# Altium PCB pcb.PcbDoc
Units mm, origin at the board's own origin, x right, y up, seen from the top; angles counter-clockwise.
Board outline 71.12 x 60.71 mm, 2 copper layers (Top Layer, Bottom Layer); 43 components, 35 nets, 151 pads, 18 vias.
Unrouted connection lines stored in the file: 6.
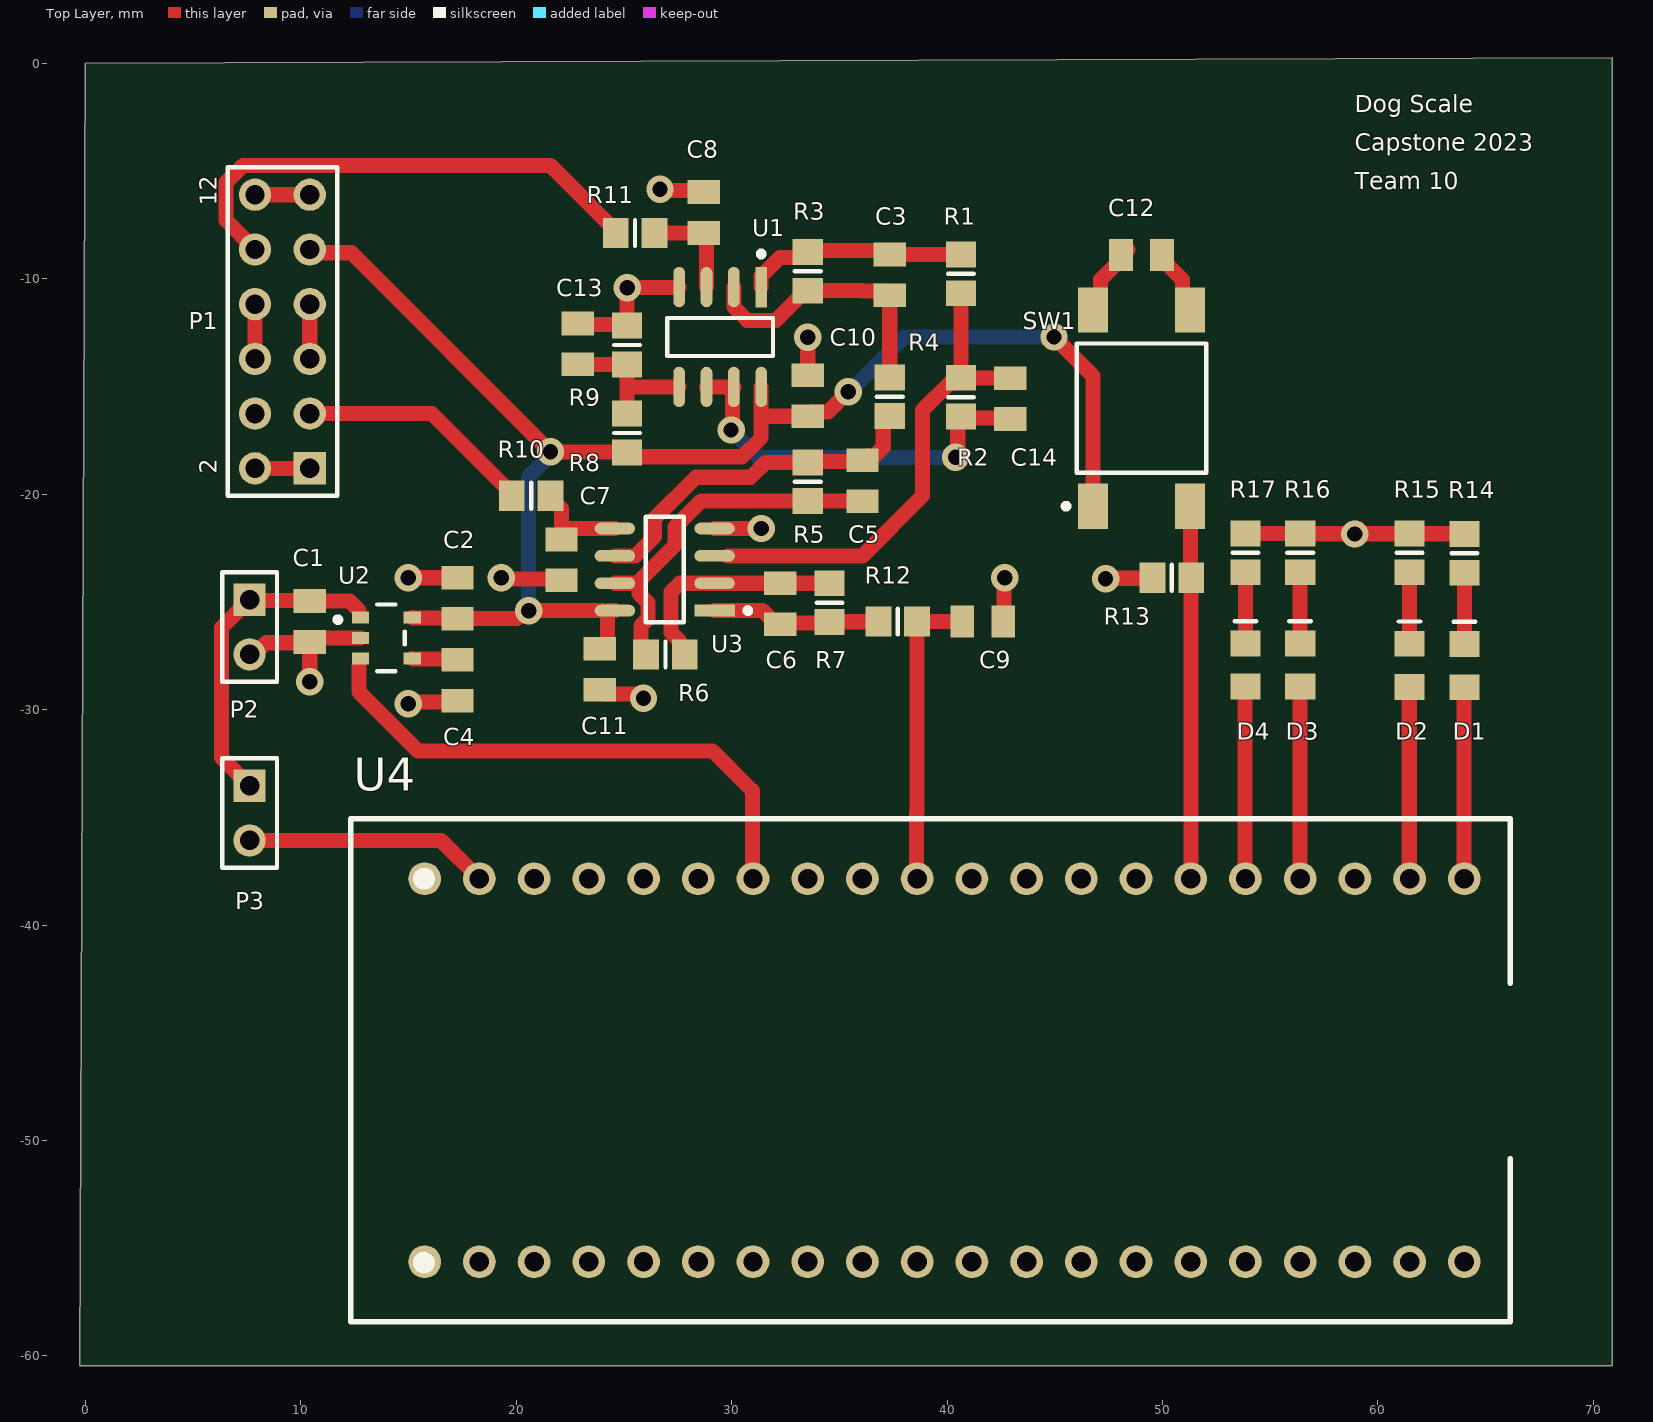
[diagram p0: Top Layer view]
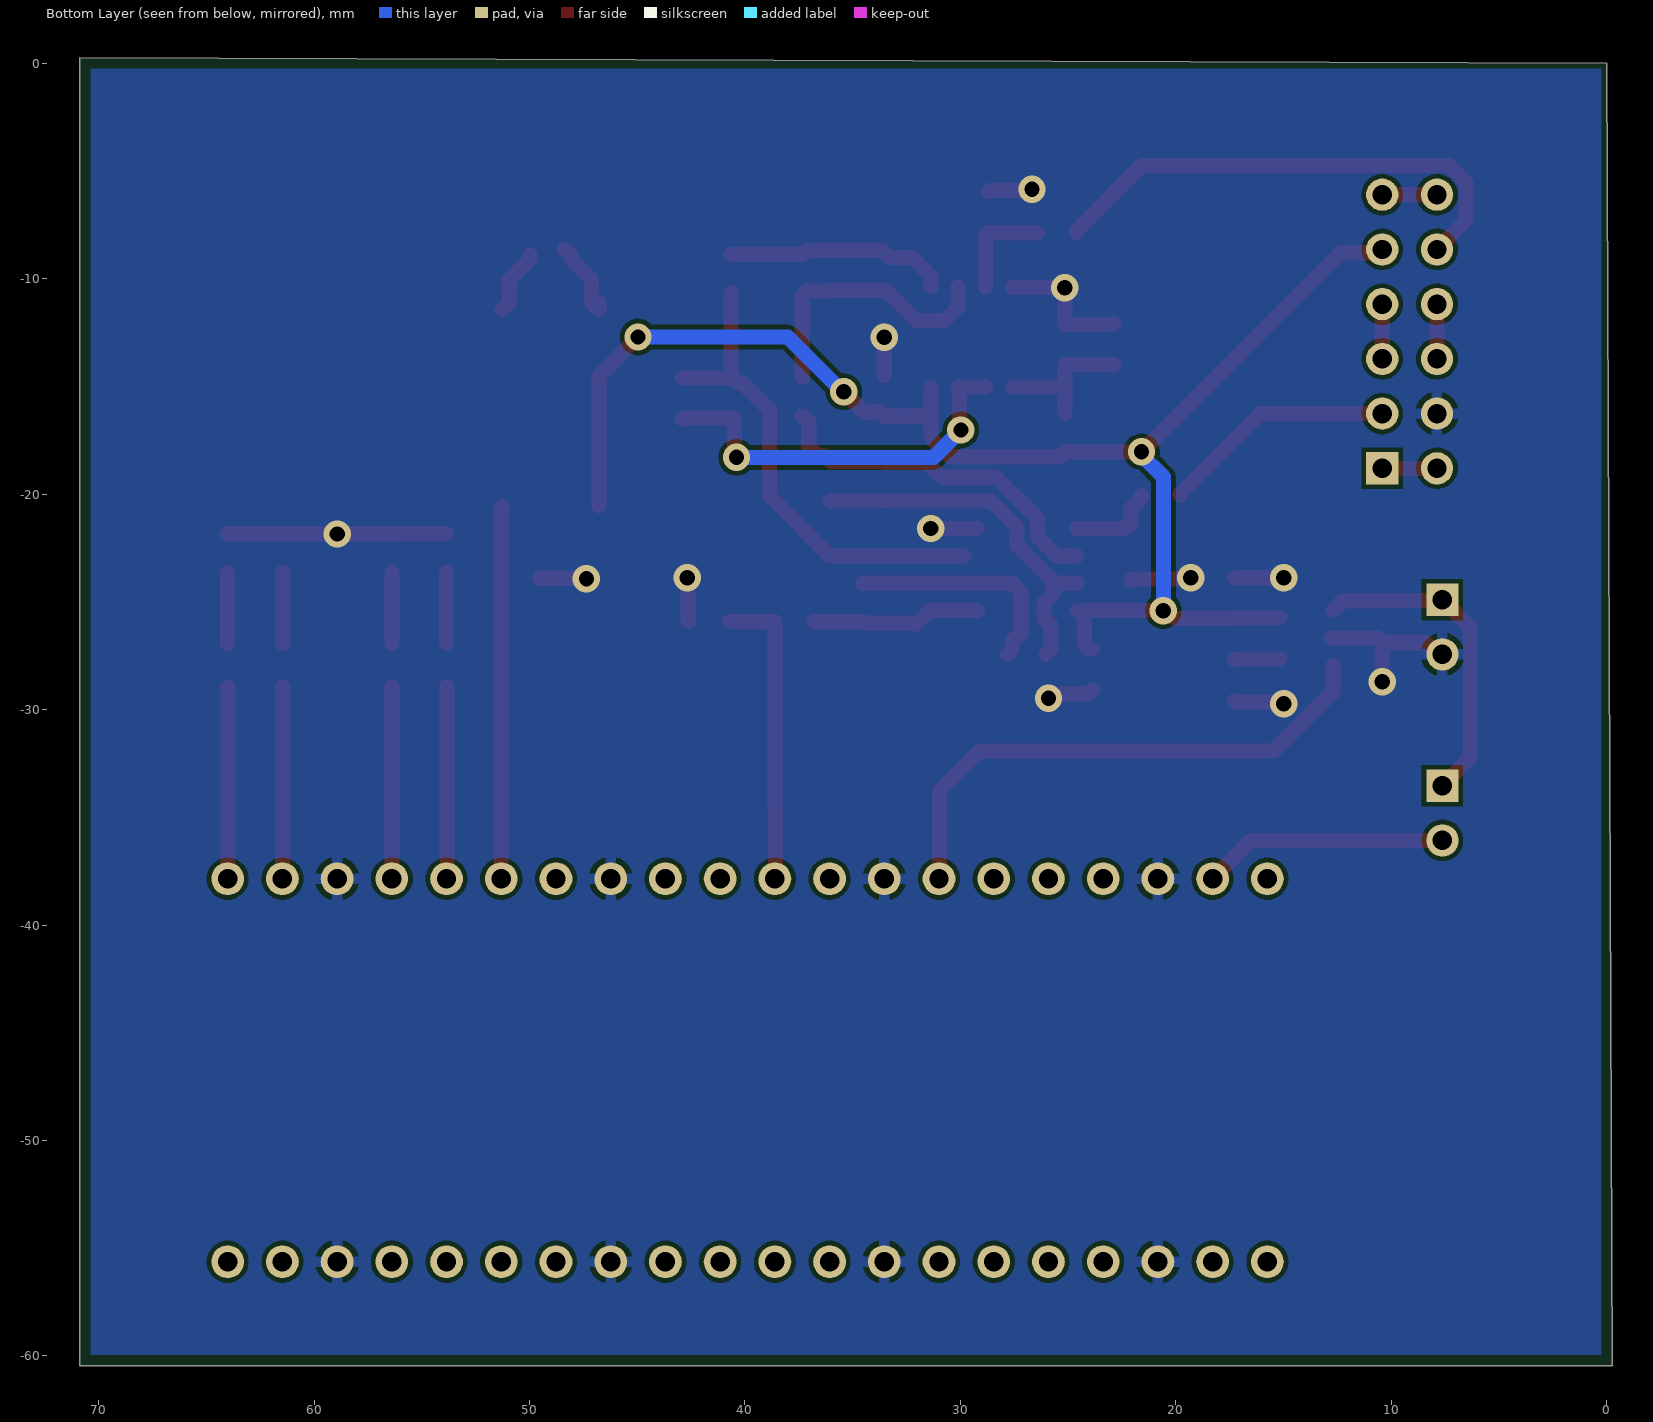
[diagram p1: Bottom Layer view, seen from below]

## Layer stack, top to bottom
Top Solder: solder mask 0.0102, Solder Resist, Dk 3.5
Top Layer: signal copper 0.0356
Dielectric 1: dielectric 0.32, FR-4, Dk 4.8
Bottom Layer: signal copper 0.0356
Bottom Solder: solder mask 0.0102, Solder Resist, Dk 3.5

## Board outline
-0.254,-60.452 70.866,-60.452 70.866,0.254 0,0

## Design rules (kind name [scope] priority, off if disabled: settings)
BoardOutlineClearance [All] p1: gap=0.2 ignorepadtopadclearanceinfootprint=FALSE except(0.4: Arc-SplitBarrior Arc-SplitContinuation Track-SplitBarrior Track-SplitContinuation SMDPad-SplitBarrior SMDPad-SplitContinuation THPad-SplitBarrior THPad-SplitContinuation Via-SplitBarrior Via-SplitContinuation Fill-SplitBarrior Fill-SplitContinuation Poly-SplitBarrior Poly-SplitContinuation Region-SplitBarrior Region-SplitContinuation Text-SplitBarrior Text-SplitContinuation)
Clearance "Clearance Bottom Layer" [OnLayer('Bottom Layer')] p1: gap=0.203 ignorepadtopadclearanceinfootprint=TRUE except(0.254: Arc-Text Track-Text SMDPad-Text THPad-Text Via-Text Fill-Text Poly-Text Region-Text Text-Text)
Clearance "Clearance Top Layer" [OnLayer('Top Layer')] p2: gap=0.203 ignorepadtopadclearanceinfootprint=TRUE except(0.254: Arc-Text Track-Text SMDPad-Text THPad-Text Via-Text Fill-Text Poly-Text Region-Text Text-Text)
Clearance [All] p3: gap=0.2 ignorepadtopadclearanceinfootprint=FALSE except(0.089: Arc-Arc Arc-Track Arc-SMDPad Track-Track Track-SMDPad SMDPad-SMDPad; 0.127: Arc-Via Track-Via SMDPad-Via THPad-Via Via-Via; 0.254: Arc-Text Track-Text SMDPad-Text THPad-Text Via-Text Fill-Text Poly-Text Region-Text Text-Text)
HoleSize [All] p1: absolutevalues=TRUE maxlimit=6.3 minlimit=0.2 maxpercent=80.000 minpercent=20.000
MinimumAnnularRing [All] p1: minimumring=0.076
MinimumSolderMaskSliver [All] p1: minsoldermaskwidth=0.1
PolygonConnect PolygonConnect_1 [All] p1: thpad.connectstyle=Relief thpad.reliefconductorwidth=0.508 thpad.reliefentries=4 thpad.polygonreliefangle="90 Angle" thpad.airgapwidth=0.254 smdpad.connectstyle=Relief smdpad.reliefconductorwidth=0.508 smdpad.reliefentries=4 smdpad.polygonreliefangle="90 Angle" smdpad.airgapwidth=0.254 via.connectstyle=Direct via.reliefconductorwidth=0.508 via.reliefentries=4 via.polygonreliefangle="90 Angle" via.airgapwidth=0.254
RoutingCorners [All] p1: cornerstyle=Round minsetback=2.54 maxsetback=2.54
RoutingVias [All] p1: holewidth=0.5 width=1 viastyle="Through Hole" minholewidth=0.2 minwidth=0.45 maxholewidth=1 maxwidth=2
SilkToSilkClearance [All] p1: silktosilkclearance=0.1
SilkToSolderMaskClearance [IsPad] p1: minsilkscreentomaskgap=0.1 clearancetoexposedcopper=TRUE
SolderMaskExpansion [All] p1: expansion=0.102 istentingtop=FALSE
Width [All] p1: maxlimit=0.7 minlimit=0.7 preferedwidth=0.7 minimp=50.000000 maximp=50.000000 favimp=50.000000
25 further rules are at their usual default settings.

## Components (designator, comment, footprint, x,y, rotation, side; value= is the part's Value field where it differs from the comment)
C1 "1u" C0805 10.414,-25.908 r90 top
C2 "2.2u" C0805 17.272,-24.826 r270 top
C3 "1n" C0805 37.338,-9.818 r90 top
C4 "100p" C0805 17.272,-28.636 r90 top
C5 "1n" C0805 36.068,-19.37 r90 top
C6 "15n" C0805 32.258,-25.08 r90 top
C7 "470n" C0805 22.098,-23.048 r90 top
C8 "470n" C0805 28.702,-6.924 r270 top
C9 "470n" C0805 41.656,-25.908 r180 top
C10 "100n" C0805 33.528,-15.428 r270 top
C11 "100n" C0805 23.876,-28.128 r90 top
C12 "470n" C0805 49.022,-8.89 r180 top
C13 "100n" C0805 22.86,-13.02 r270 top
C14 "15n" C0805 42.926,-15.56 r90 top
D1 "LED" LED0805 64.008,-27.956 r90 top
D2 "LED" LED0805 61.468,-27.94 r90 top
D3 "LED" LED0805 56.388,-27.924 r90 top
D4 "LED" LED0805 53.848,-27.924 r90 top
P1 "Header 6X2" HDR2X6 10.414,-18.796 r90 top
P2 "Header 2" HDR1X2 7.62,-24.892 r270 top
P3 "Header 2" HDR1X2 7.62,-33.528 r270 top
R1 "10k" R0805 40.64,-9.768 r90 top
R2 "33k" R0805 40.64,-15.494 r90 top
R3 "270k" R0805 33.528,-9.652 r90 top
R4 "1.2k" R0805 37.338,-15.472 r90 top
R5 "270k" R0805 33.528,-19.42 r90 top
R6 "10k" R0805 26.924,-27.432 r180 top
R7 "33k" R0805 34.544,-25.03 r90 top
R8 "15k" R0805 25.146,-17.156 r270 top
R9 "18k" R0805 25.146,-13.07 r270 top
R10 "1k" R0805 20.69,-20.066 r180 top
R11 "1k" R0805 25.516,-7.874 r180 top
R12 "1k" R0805 37.708,-25.908 r180 top
R13 "220" R0805 50.43,-23.876 r0 top
R14 "220" R0805 64.008,-22.744 r270 top
R15 "220" R0805 61.468,-22.722 r270 top
R16 "220" R0805 56.388,-22.722 r270 top
R17 "220" R0805 53.848,-22.722 r270 top
SW1 "FSM6JSMA" TECO-FSM6JSMA_V 49.022,-16.002 r180 top
U1 "LM358DR2G" FP-751-07-IPC_C 29.464,-12.7 r270 top
U2 "AP2202K-3.3TRG1" FP-SOT25-MFG 13.97,-26.67 r0 top
U3 "LM358DR2G" FP-751-07-IPC_C 26.894,-23.495 r180 top
U4 "RPI" RPI-PICO-MOD 40.259,-46.736 r90 top

## Footprints (in the part's own frame and the unit in brackets; to place one, negate y for a bottom-side part, rotate by r counter-clockwise, add the part's x,y. Pads: shape width x height; smd on the part's side, far side on the other; paste and mask are expansions set on the pad)
C0805 [mm]
  rect 1.1x1.5 smd: 1(-0.95,0) 2(0.95,0)
  body extent -1.1,-0.72 1.1,0.72, height 1.1
FP-751-07-IPC_C [mm]
  rect 1.874x0.543 smd paste+0 mask+0: 1(-2.316,1.905)
  rrect100% 1.874x0.543 smd paste+0 mask+0: 2(-2.316,0.635) 3(-2.316,-0.635) 4(-2.316,-1.905) 5(2.316,-1.905) 6(2.316,-0.635) 7(2.316,0.635) 8(2.316,1.905)
  silkscreen extent -3.98,-2.45 0.88,2.45, body extent -3.35,-2.55 3.35,2.55, height 0.25
FP-SOT25-MFG [mm]
  rect 0.8x0.55 smd paste+0 mask+0: 1(-1.2,0.95) 2(-1.2,0) 3(-1.2,-0.95) 4(1.2,-0.95) 5(1.2,0.95)
  silkscreen extent -2.37,-1.55 0.85,1.55, body extent -1.7,-1.65 1.7,1.65, height 0.25
HDR1X2 [mm] "Connector; Header; 2 Position"
  rect 1.5x1.5 hole 0.9: 1(0,0)
  round 1.5 hole 0.9: 2(2.54,0)
  silkscreen extent -1.27,-1.27 3.81,1.27
HDR2X6 [mm] "Connector; Header; 6x2 Position"
  rect 1.5x1.5 hole 0.9: 1(0,0)
  round 1.5 hole 0.9: 2(0,2.54) 3(2.54,0) 4(2.54,2.54) 5(5.08,0) 6(5.08,2.54) 7(7.62,0) 8(7.62,2.54) 9(10.16,0) 10(10.16,2.54) 11(12.7,0) 12(12.7,2.54)
  silkscreen extent -1.27,-1.27 13.97,3.81
LED0805 [mm]
  rect 1.2x1.4 smd: 1(-1,0) 2(1,0)
  silkscreen extent 2.03,-0.5 2.03,0.5, body extent -1.07,-0.7 1.07,0.7, height 0.65
R0805 [mm]
  rect 1.2x1.4 smd: 1(-0.9,0) 2(0.9,0)
  silkscreen extent 0,-0.6 0,0.6, body extent -1.07,-0.7 1.07,0.7, height 0.65
RPI-PICO-MOD [mil] "RASPBERRY PI PICO RP2040 BOARD"
  round 60 hole 35.43: 0.9mm(350,65) 1(-350,965) 2(-350,865) 3(-350,765) 4(-350,665) 5(-350,565) 6(-350,465) 7(-350,365) 8(-350,265) 9(-350,165) 10(-350,65) 11(-350,-35) 12(-350,-135) 13(-350,-235) 14(-350,-335) 15(-350,-435) 16(-350,-535) 17(-350,-635) 18(-350,-735) 19(-350,-835) 20(-350,-935) 21(350,-935) 22(350,-835) 23(350,-735) 24(350,-635) 25(350,-535) 26(350,-435) 27(350,-335) 28(350,-235) 29(350,-135) 30(350,-35) 32(350,165) 33(350,265) 34(350,365) 35(350,465) 36(350,565) 37(350,665) 38(350,765) 39(350,865) 40(350,965)
  silkscreen extent -460,-1019 460,1100
TECO-FSM6JSMA_V [mm] "SMD, 4-Leads, Body 6x6mm, Pitch 4.5mm"
  rect 1.4x2.1 smd: 1(2.25,4.55) 2(2.25,-4.55) 3(-2.25,4.55) 4(-2.25,-4.55)
  silkscreen extent -3,-3 3.62,4.67, body extent -3,-5 3,5, height 7.11

## Part data
C1 C2 C3 C4 C5 C6 C7 C8 C9 C10 C11 C12 C13 C14: library part CCAP0805, "CCAP0805"
P1: "Header, 6-Pin, Dual row", LatestRevisionDate=17-Jul-2002, LatestRevisionNote="Re-released for DXP Platform.", Publisher="Altium Limited"
P2 P3: "Header, 2-Pin", LatestRevisionDate=17-Jul-2002, LatestRevisionNote="Re-released for DXP Platform.", Publisher="Altium Limited"
R1 R2 R3 R4 R5 R6 R7 R8 R9 R10 R11 R12 R13 R14 R15 R16 R17: library part RES0805, "RES0805"
SW1: library part CMP-2000-07503-1, "Switch, SPST, 24 V, -35 to 85 degC, 4-Pin SMD, RoHS, Tape and Reel", Case\/Package=SMD/SMT, Contact Current Rating=50mA, Contact Resistance=100mOhm, Insulation Resistance=100MOhm, Manufacturer="TE Connectivity", Max Operating Temperature=85degC, Max Voltage Rating (DC)=12V, Min Operating Temperature=-35degC, Operating Force=1.57N, Package Description="4-Pin Surface Mount Device, Body 6 x 6 mm, Pitch 4.5 mm", Package Quantity=750, Supplier Part Number 1=450-1133-ND, Voltage Rating=24V, Actuator Length=3.4mm, Actuator Material=Polyamide, Actuator Type=Standard, Category=Uncategorized, Contact Material=CopperAlloy, Contact Plating=Silver, Current Rating=50mA, Datasheet URL=http://www.te.com/commerce/DocumentDelivery/DDEController?Action=showdoc&DocId=Customer+Drawing%7F2-1437565-7%7FV%7Fpdf%7FEnglish%7FENG_CD_2-1437565-7_V.pdf%7F4-1437565-9, Datasheet Version="Rev. V, 02/2015", Depth=10mm, Electrical Life=100000Cycles, ELV=Compliant, Illumination Type=Illuminated, Lead Free=LeadFree, Length=6mm, Manufacturer Part Number=FSM6JSMA, Manufacturer URL=http://www.te.com/, Max Current Rating=50mA, Mechanical Life=100000Cycles, Mount=SurfaceMount, Mounting Technology=SurfaceMount, Orientation=Straight, Package Reference=FSM6JSMA, Packaging=LoosePiece, Pricing 1="1=0.35000, 10=0.33500, 25=0.31560, 100=0.27390, 250=0.24852, 500=0.23116, 1000=0.20805, 2500=0.19534, 5000=0.18147 (USD)", Radiation Hardening=No, REACH SVHC=Unknown, RoHS=Yes, RoHS Compliant=Yes, RoHSCompliant=true, Series=FSMJSMA, Stock 1=22985, Supplier 1=Digi-Key, Switch Function=Off-Mom, Switch Travel=0.25mm, Termination=GullWing, Throw Configuration=SPST, Type=Switch, Voltage Rating (DC)=24V, Width=6mm
U1 U3: library part CMP-1310-00291-2, "IC OPAMP GP 2 CIRCUIT 8SOIC", Case/Package=SOIC, Dual Supply Voltage=9V, Input Bias Current=250nA, Input Offset Voltage (Vos)=7mV, Manufacturer="ON Semiconductor", Max Dual Supply Voltage=16V, Max Operating Temperature=70°C, Max Supply Voltage=32V, Min Dual Supply Voltage=1.5V, Min Operating Temperature=0°C, Min Supply Voltage=3V, Nominal Supply Current=1.2mA, Operating Supply Current=1.5mA, Output Current=40mA, Package Quantity=2500, Power Supply Rejection Ratio (PSRR)=65dB, Supplier Part Number 1=LM358DR2GOSCT-ND, Voltage Gain=100dB, Amplifier Type="GENERAL PURPOSE", Bandwidth=1MHz, Category="Amplifiers - Op Amps, Buffer, Instrumentation", Channel Separation=-120dB, Common Mode Rejection Ratio=65dB, Contact Plating=Tin, Gain Bandwidth Product=1MHz, Halogen Free="Halogen Free", Height=1.5mm, Lead Free="Lead Free", Length=5mm, Manufacturer Part Number=LM358DR2G, Number of Amplifiers=2, Number of Channels=2, Number of Circuits=2, Number of Elements=2, Number of Pins=8, Operating Supply Voltage=16V, Output Current per Channel=40mA, Packaging="Tape and Reel", Pricing 1="1=0.48000, 10=0.38600, 25=0.35320, 100=0.26290, 250=0.23824, 500=0.19716, 1000=0.14787 (USD)", Radiation Hardening=No, REACH SVHC="No SVHC", Reach SVHC Compliant=Yes, RoHS=Yes, RoHS Compliant=Yes, Series=-, Slew Rate=0.6V/µs, Stock 1=86894, Supplier 1=Digi-Key, Supply Current=1.2mA, Technology=BIPOLAR, Width=4mm
U2: library part CMP-12756-000010-1, "IC REG LINEAR 3.3V 150MA SOT23-5", Case/Package=SOT-23-5, Dropout Voltage=165mV, Manufacturer="Diodes Inc.", Max Input Voltage=13.2V, Max Junction Temp=+125°C, Max Operating Temperature=125°C, Max Output Current=150mA, Min Input Voltage=2.5V, Min Operating Temperature=-40°C, Nominal Supply Current=95-1300uA, Output Voltage=3.3V, Package=SOT25, Package Quantity=1, Power Supply Rejection Ratio (PSRR)=75dB, Quiescent Current=130uA, Supplier Part Number 1=AP2202K-3.3TRG1DICT-ND, Temperature="-40°C to +125°C", Accuracy=1%, Accuracy Percentage=1%, Automotive=No, Category=IC, ComponentLink1Description=https://datasheet.ciiva.com/30016/ap2202-30016782.pdf?src-supplier=Avnet, ComponentLink1URL=https://datasheet.ciiva.com/30016/ap2202-30016782.pdf?src-supplier=Avnet, ComponentLink2Description=Datasheet, ComponentLink2URL=https://www.diodes.com/assets/Datasheets/AP2202.pdf, ComponentLink3Description=https://datasheet.ciiva.com/29568/ap2202-29568315.pdf?src-supplier=Digi-Key, ComponentLink3URL=https://datasheet.ciiva.com/29568/ap2202-29568315.pdf?src-supplier=Digi-Key, ComponentLink4Description=https://datasheet.ciiva.com/29568/ap2202-29568316.pdf?src-supplier=Digi-Key, ComponentLink4URL=https://datasheet.ciiva.com/29568/ap2202-29568316.pdf?src-supplier=Digi-Key, ComponentLink5Description=https://datasheet.ciiva.com/29568/ap2202-29568314.pdf?src-supplier=Digi-Key, ComponentLink5URL=https://datasheet.ciiva.com/29568/ap2202-29568314.pdf?src-supplier=Digi-Key, Device Class L1="Integrated Circuits (ICs)", Device Class L2="Power Management ICs", Device Class L3="Voltage Regulators - Linear", Digikey Description="IC REG LINEAR 3.3V 150MA SOT23-5", Footprint Url=https://www.diodes.com/assets/Package-Files/SOT25.pdf, Height=1.4mm, Ipc Land Pattern Name=SOT95P280X115-5, Lead Free=Yes, Length=3.02mm, Manufacturer Part Number=AP2202K-3.3TRG1, Max Supply Voltage=13.2V, Min Supply Voltage=2.5V, Mount="Surface Mount", Mouser Description="LDO Voltage Regulators 150mA CMOS LDO 3.3V", Number Of Outputs=1, Number of Pins=5, Number of Regulators=1, Octopart=https://octopart.com/ap2202k-3.3trg1-diodes+inc.-30954618, Output Current=150mA, Output Type=Fixed, Packaging="Tape and Reel", Polarity=Positive, Pricing 1="1=0.46000, 10=0.34300, 25=0.30880, 100=0.21350, 250=0.17976, 500=0.14606, 1000=0.11236 (USD)", RoHS=TRUE, RoHS Compliant=Yes, Standoff Height=0.013mm, Stock 1=55855, Supplier 1=Digi-Key, Temperature Range High=+125°C, Temperature Range Low=-40°C, Weight=0.001058oz, Width=1.7mm

## Via types
v1: diameter 1.27, hole 0.711, Top Layer to Bottom Layer, 18 vias

## Nets (pads, with @x,y where several pads share a name; then routed paths per layer and width w, separated by ;. In a path a pad name is that pad's centre, name@x,y a point inside that pad or via, vN(x,y) a via of type N, cw(c..) or ccw(c..) an arc to the next point about the centre after c; other vN are vias at no path point)
GND: C1.1 C2.1 C4.1 C7.1 C8.1 C9.1 C10.1 C11.1 C13.1 P1.4 P2.2 R9.1 R13.1 R14.1 R15.1 R16.1 R17.1 U1.4 U2.2 U3.4 U4.3 U4.8 U4.13 U4.18 U4.23 U4.28 U4.33 U4.38 | length 44
  Top Layer w0.7: P2.2 7.836,-27.432 8.377,-26.891 10.381,-26.891 C1.1 ; v1(10.414,-28.702) C1.1 ; U2.2 10.602,-26.67 C1.1 ; v1(14.986,-29.718) 15.052,-29.652 17.206,-29.652 C4.1 ; v1(14.986,-23.876) C2.1 ; v1(19.304,-23.876) 19.365,-23.937 22.037,-23.937 C7.1 ; C13.1 22.91,-12.12 25.096,-12.12 R9.1 v1(25.146,-10.414) 25.161,-10.399 27.544,-10.399 U1.4 ; C11.1 24.076,-29.278 25.568,-29.278 25.754,-29.464 v1(25.908,-29.464) ; v1(26.67,-5.842) 26.736,-5.908 28.636,-5.908 C8.1 ; U3.4 31.365,-21.59 v1(31.369,-21.586) ; C10.1 33.531,-14.475 33.531,-12.709 v1(33.534,-12.706) ; C9.1 42.639,-25.875 42.639,-23.909 v1(42.672,-23.876) ; v1(47.355,-23.923) 47.379,-23.9 49.506,-23.9 R13.1 ; R17.1 R16.1 56.399,-21.833 58.917,-21.833 v1(58.928,-21.844) 58.939,-21.833 61.457,-21.833 R15.1 61.479,-21.833 63.997,-21.833 R14.1 ; U4.23@58.918,-37.836 U4.23
NetC3_1: C3.1 R3.1 R4.2 U1.2 | length 12.9
  Top Layer w0.7: U1.2 30.099,-11.303 30.721,-11.925 32.055,-11.925 33.436,-10.544 36.06,-10.544 36.084,-10.568 37.122,-10.568 37.338,-10.784 R4.2
NetC3_2: C3.2 R1.2 R3.2 U1.1 | length 10.3
  Top Layer w0.7: U1.1 31.369,-9.875 32.242,-9.002 33.278,-9.002 R3.2 33.586,-8.694 37.164,-8.694 C3.2 R1.2
NetC4_2: C4.2 U2.4 | length 2.1
  Top Layer w0.7: U2.4 15.203,-27.653 17.239,-27.653 C4.2
NetC5_1: C5.1 R5.1 R6.2 U3.7 | length 16.8
  Top Layer w0.7: U3.7 U3.7@25.4,-24.13 ; R6.2 25.79,-27.198 25.79,-26.092 26.119,-25.763 26.119,-25.037 25.698,-24.616 25.698,-24.036 27.37,-22.364 27.37,-21.526 28.576,-20.32 R5.1 ; R5.1@33.782,-20.32 C5.1
NetC5_2: C5.2 R4.1 R5.2 U3.6 | length 16.6
  Top Layer w0.7: U3.6 25.525,-22.86 26.416,-21.969 26.416,-21.131 28.336,-19.211 30.88,-19.211 31.571,-18.52 R5.2 33.578,-18.47 36.018,-18.47 36.268,-18.22 36.624,-18.22 37.035,-17.81 37.035,-16.622 37.285,-16.372 R4.1
NetC6_2: C6.2 R6.1 R7.2 U3.2 | length 10.7
  Top Layer w0.7: R6.1 27.574,-27.182 27.574,-26.812 27.178,-26.416 27.178,-24.54 27.588,-24.13 C6.2 R7.2
NetC12_1: C12.1 SW1.4 | length 3.1
  Top Layer w0.7: C12.1 49.972,-9.09 50.922,-10.04 50.922,-11.102 SW1.4
NetC12_2: C12.2 SW1.2 | length 3.7
  Top Layer w0.7: SW1.2@46.772,-11.102 SW1.2 47.122,-11.102 47.122,-10.04 48.072,-9.09 C12.2 ; C12.2@48.192,-8.836 C12.2@48.392,-8.636
NetC13_2: C13.2 R8.1 R9.2 U1.5 | length 7
  Top Layer w0.7: C13.2 R9.2 25.146,-15.113 ; R8.1 25.146,-15.113 ; U1.5 25.243,-15.016 25.146,-15.113
NetC14_2: C14.2 R1.1 R2.2 U3.3 | length 22.8
  Top Layer w0.7: U3.3@29.797,-22.86 36.068,-22.86 38.862,-20.066 38.862,-16.09 40.108,-14.844 40.29,-14.844 40.532,-14.602 42.918,-14.602 C14.2 ; R2.2 R1.1
NetD1_2: D1.2 R14.2 | length 3.3
  Top Layer w0.7: D1.2 R14.2
NetD2_2: D2.2 R15.2 | length 3.3
  Top Layer w0.7: D2.2 R15.2
NetD3_2: D3.2 R16.2 | length 3.3
  Top Layer w0.7: D3.2 R16.2
NetD4_2: D4.2 R17.2 | length 3.3
  Top Layer w0.7: D4.2 R17.2
NetP1_1: P1.1 P1.2 | length 2.5
  Top Layer w0.7: P1.2@7.612,-18.796 P1.1@10.152,-18.796
NetP1_5: P1.5 P1.7 | length 2.5
  Top Layer w0.7: P1.5 P1.7@10.414,-11.262
NetP1_6: P1.6 P1.8 | length 2.4
  Top Layer w0.7: P1.6 P1.8@7.874,-11.325
NetP1_11: P1.11 P1.12 | length 2.5
  Top Layer w0.7: P1.12 P1.11
PwrLED: D1.1 U4.21 | length 8.9
  Top Layer w0.7: U4.21 63.993,-37.831 63.993,-28.971 D1.1
RegEn: U2.3 U4.34 | length 25.5
  Top Layer w0.7: 12.7,-27.94 12.7,-29.184 15.436,-31.921 29.118,-31.921 30.957,-33.76 30.957,-37.815 U4.34
SteadyLED: D3.1 U4.24 | length 8.9
  Top Layer w0.7: U4.24 56.373,-37.831 56.373,-28.94 D3.1
TarLED: D4.1 U4.25 | length 8.9
  Top Layer w0.7: U4.25 53.833,-37.831 53.833,-28.94 D4.1
TarSw: R13.2 SW1.3 U4.26 | length 17.3
  Top Layer w0.7: SW1.3 51.301,-20.581 51.301,-23.847 R13.2 51.33,-37.824 U4.26
VBAT: C1.2 P2.1 P3.1 U2.1 | length 15
  Top Layer w0.7: P3.1 6.317,-32.225 6.317,-26.195 P2.1 7.653,-24.925 10.381,-24.925 C1.2 12.258,-24.958 12.7,-25.4
VCC: C2.2 C10.2 C11.2 P1.9 R8.2 SW1.1 U1.8 U2.5 U3.8 | length 70.5
  Top Layer w0.7: P1.9 10.567,-8.789 12.345,-8.789 v1(21.59,-18.034) 21.601,-18.045 25.135,-18.045 25.347,-18.257 30.485,-18.257 31.369,-17.373 31.369,-16.51 ; U2.5 15.198,-25.748 17.244,-25.748 C2.2 20.044,-25.776 20.42,-25.4 v1(20.574,-25.4) U3.8@23.991,-25.4 ; C11.2 24.027,-27.178 24.227,-26.978 24.227,-25.478 24.305,-25.4 U3.8 ; U1.8 31.369,-16.51 ; v1(35.406,-15.24) 34.468,-16.178 33.728,-16.178 C10.2 31.501,-16.378 31.369,-16.51 ; v1(44.958,-12.7) 46.772,-14.514 SW1.1
  Bottom Layer w0.7: v1(20.574,-25.4) 20.574,-19.204 21.59,-18.188 v1(21.59,-18.034) ; v1(35.406,-15.24) 35.467,-15.24 38.007,-12.7 v1(44.958,-12.7)
Vfil: C6.1 R7.1 R12.2 U3.1 | length 7.9
  Top Layer w0.7: U3.1 31.428,-25.4 32.058,-26.03 C6.1 32.308,-25.98 34.494,-25.98 R7.1 34.555,-25.919 36.797,-25.919 R12.2
Vin+: C7.2 R10.1 U3.5 | length 4.1
  Top Layer w0.7: R10.1 21.59,-20.166 22.098,-20.674 22.098,-21.386 22.302,-21.59 U3.5
Vin-: C8.2 R11.1 U1.3 | length 4.8
  Top Layer w0.7: R11.1 C8.2 28.829,-8.001 U1.3
Voff: C14.1 R2.1 U1.6 U1.7 | length 18.6
  Top Layer w0.7: U1.6 U1.7 30.035,-15.08 30.035,-16.954 v1(29.972,-17.018) ; v1(40.386,-18.288) 40.495,-18.179 40.495,-16.465 40.482,-16.452 42.868,-16.452 C14.1
  Bottom Layer w0.7: v1(29.972,-17.018) 31.242,-18.288 v1(40.386,-18.288)
Vout: C9.2 R12.1 U4.0.9mm | length 14.1
  Top Layer w0.7: U4.0.9mm 38.577,-37.815 38.577,-34.76 38.593,-34.744 38.593,-25.923 R12.1 C9.2
Vsen+: P1.3 R10.2 | length 11
  Top Layer w0.7: P1.3 16.08,-16.256 19.79,-19.966 R10.2
Vsen-: P1.10 R11.2 | length 23.4
  Top Layer w0.7: P1.10 6.52,-7.282 6.52,-5.535 7.313,-4.742 21.584,-4.742 24.616,-7.774 R11.2
VSYS: P3.2 U4.39 | length 11.4
  Top Layer w0.7: P3.2 16.51,-36.068 U4.39
WifiLED: D2.1 U4.22 | length 8.9
  Top Layer w0.7: U4.22 61.453,-37.831 61.453,-28.955 D2.1
pads on no net: U4.1 U4.2 U4.4 U4.5 U4.6 U4.7 U4.9 U4.10 U4.11 U4.12 U4.14 U4.15 U4.16 U4.17 U4.19 U4.20 U4.27 U4.29 U4.30 U4.32 U4.35 U4.36 U4.37 U4.40

## Polygon pours and split planes (outlines as drawn)
GND on Bottom Layer "GND_L02_P001" (solid, pour order 1): 0.254,-0.254 70.358,-0.254 70.358,-59.944 0.254,-59.944

## Silkscreen, mask and mechanical layers (free items; w line width, h text height)
Top Overlay:
  text "Dog Scale" at 58.928,-2.273 h0.8
  text "Capstone 2023" at 58.928,-4.051 h0.8
  text "Team 10" at 58.928,-5.842 h0.8
Outline:
  lines w0.254: 0,-60.452 0,0 70.866,0 70.866,-60.452 0,-60.452

## Text inside footprints (layer, text, board x,y; h text height)
P1: Top Overlay "12" at 6.096,-6.604 h0.8 r90; Top Overlay "2" at 6.096,-19.05 h0.8 r90